# Altium PCB PCB1.PcbDoc
Units mm, origin at the board's own origin, x right, y up, seen from the top; angles counter-clockwise.
Board outline 75.44 x 46.61 mm, 4 copper layers (Top Layer, Mid Layer 1, 3V3, Bottom Layer), stack 1.57 mm thick; 36 components, 27 nets, 138 pads, 32 vias.
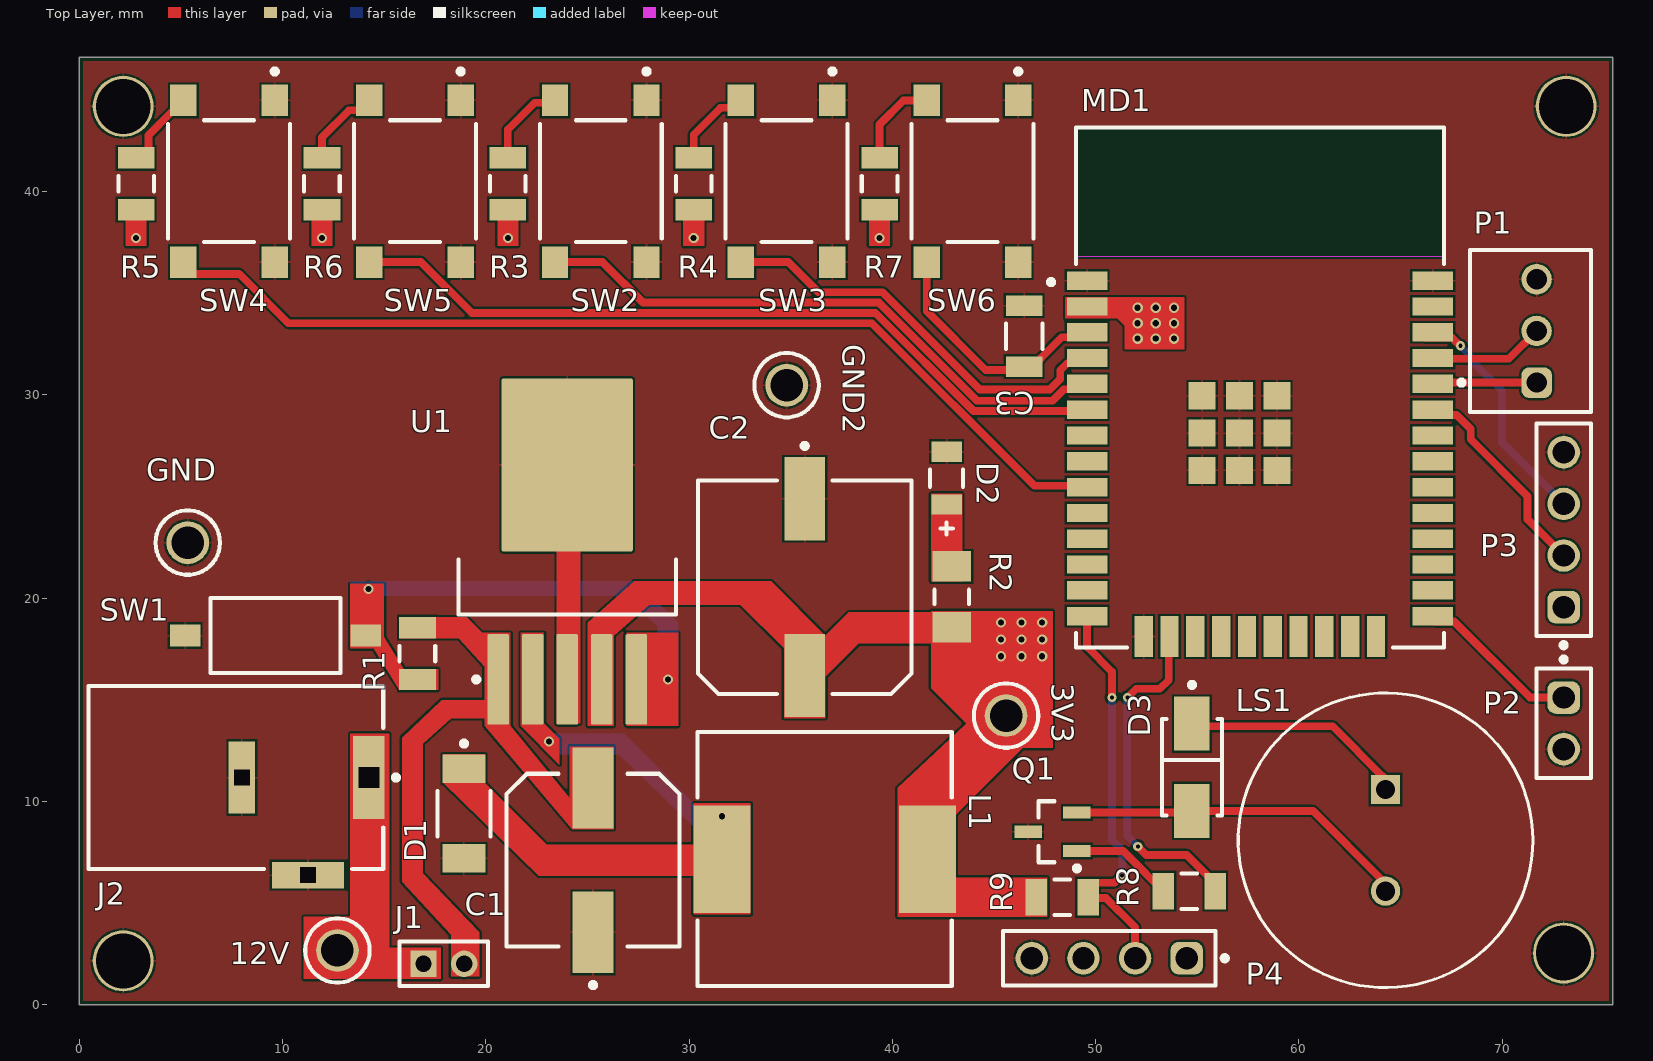
[diagram p0: Top Layer view]
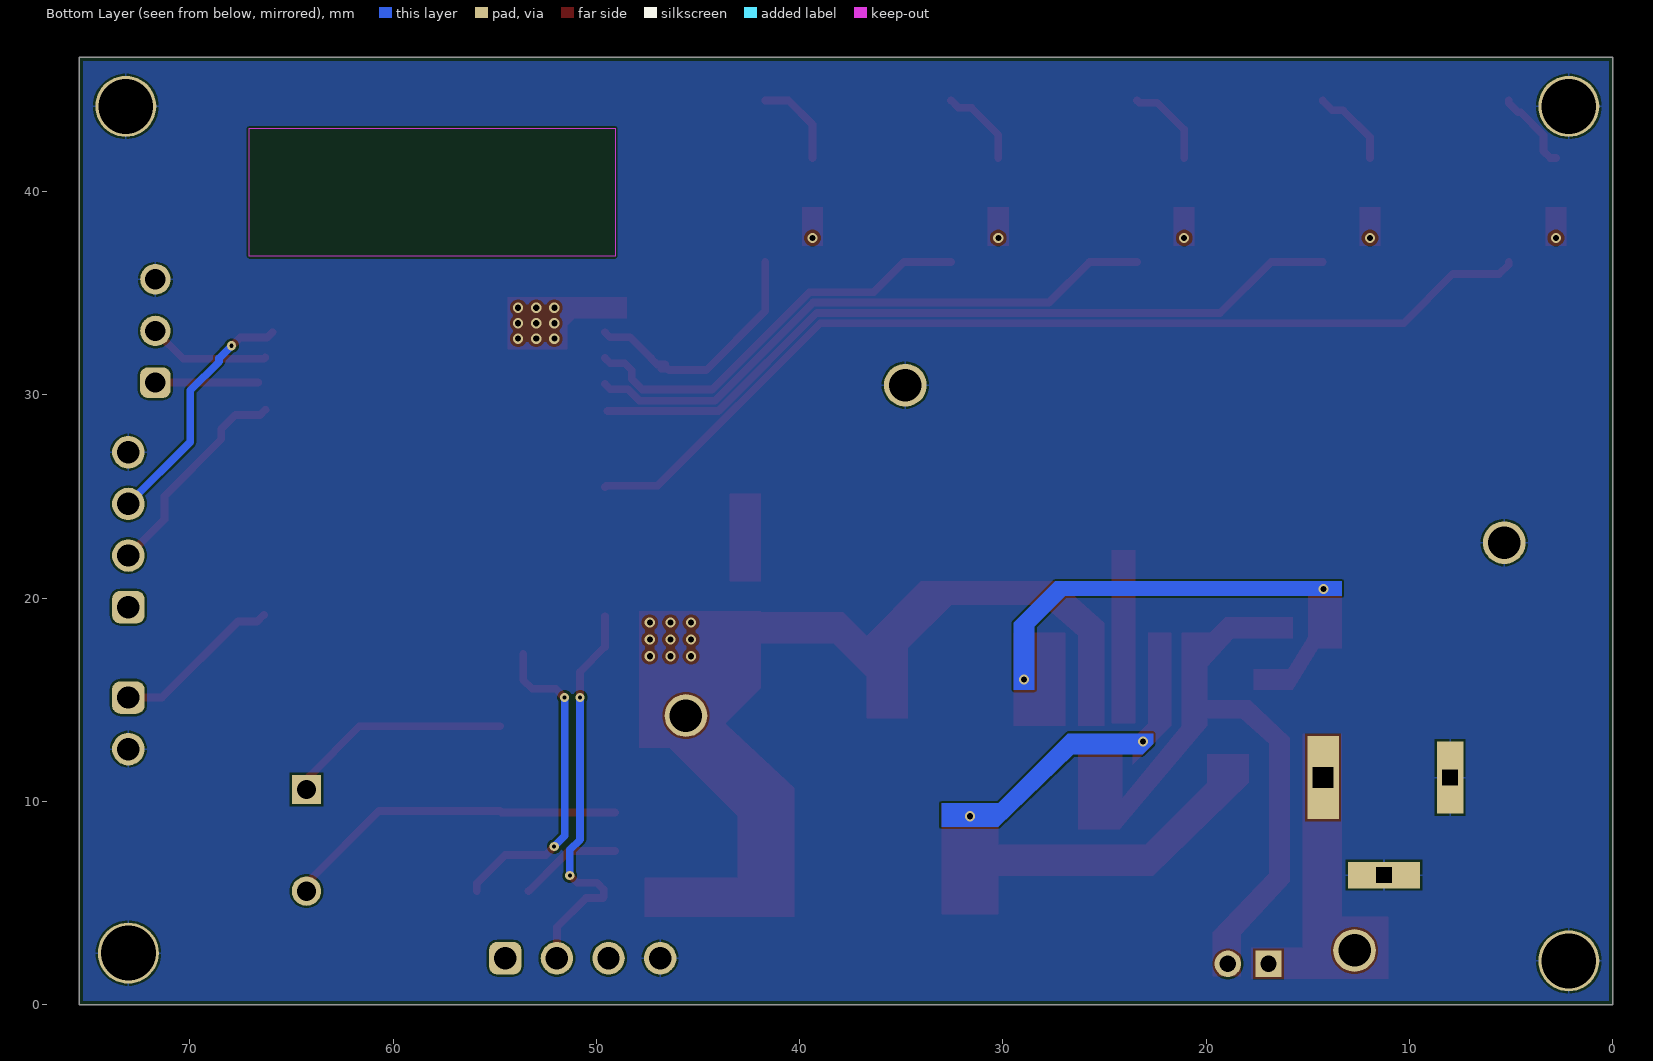
[diagram p1: Bottom Layer view, seen from below]
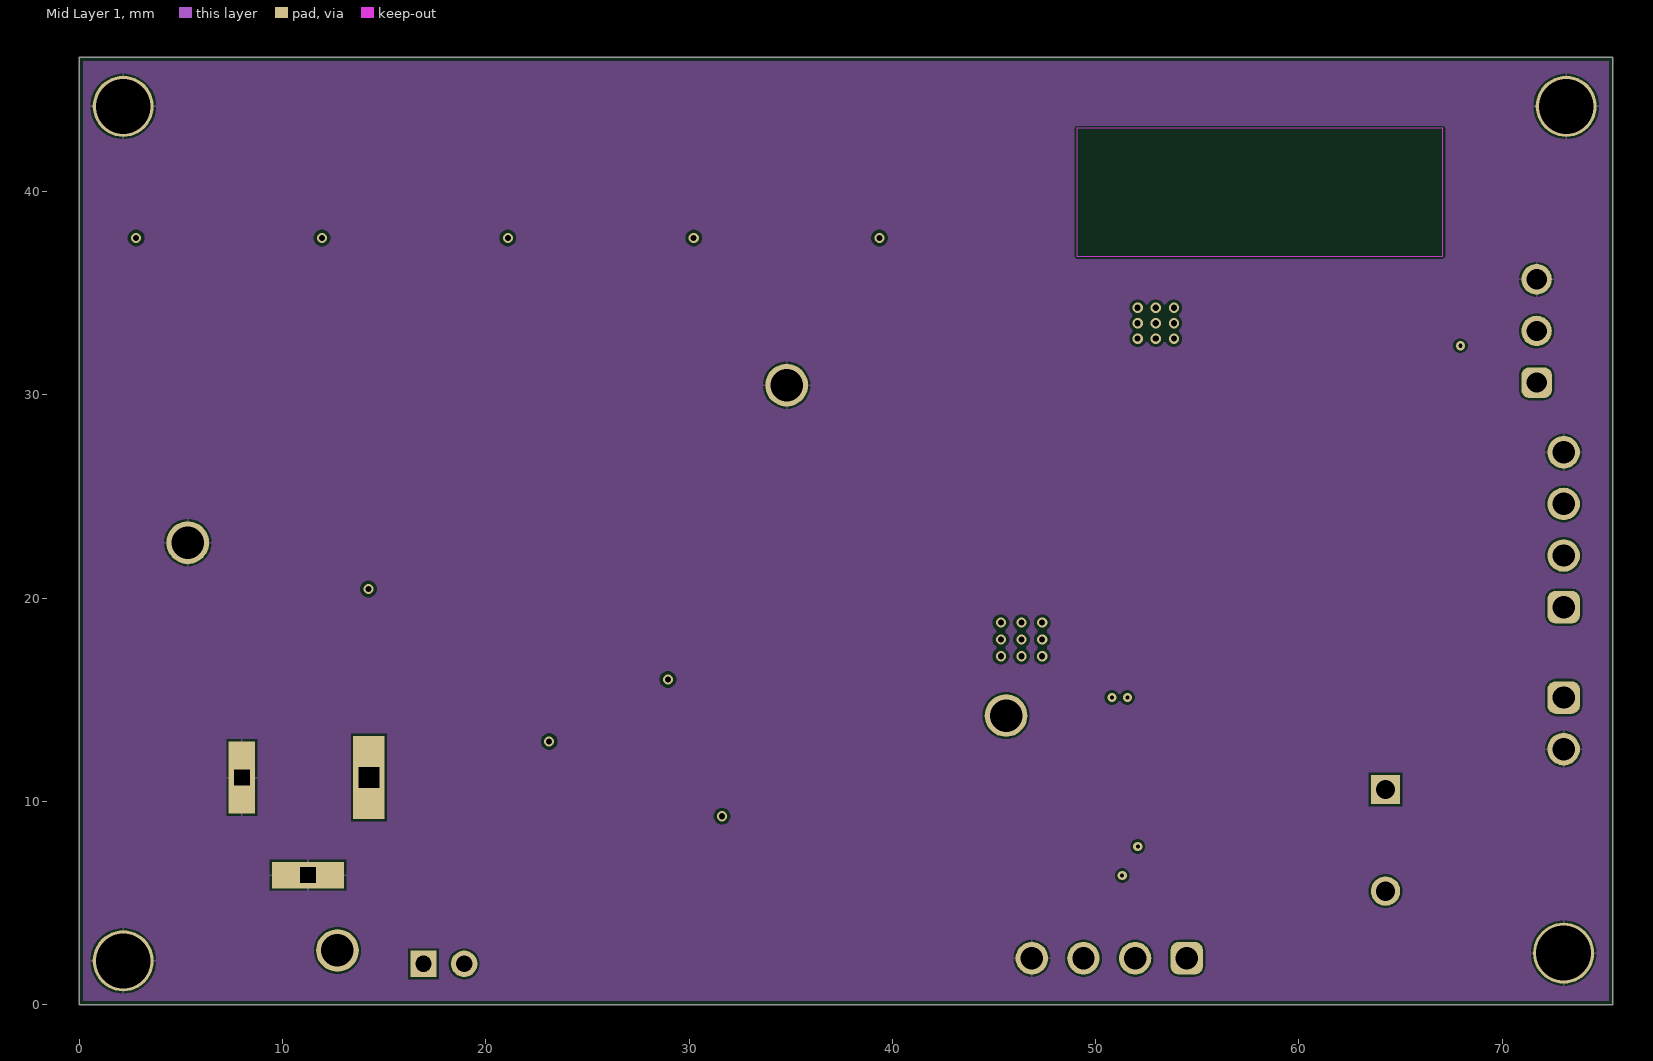
[diagram p2: Mid Layer 1]
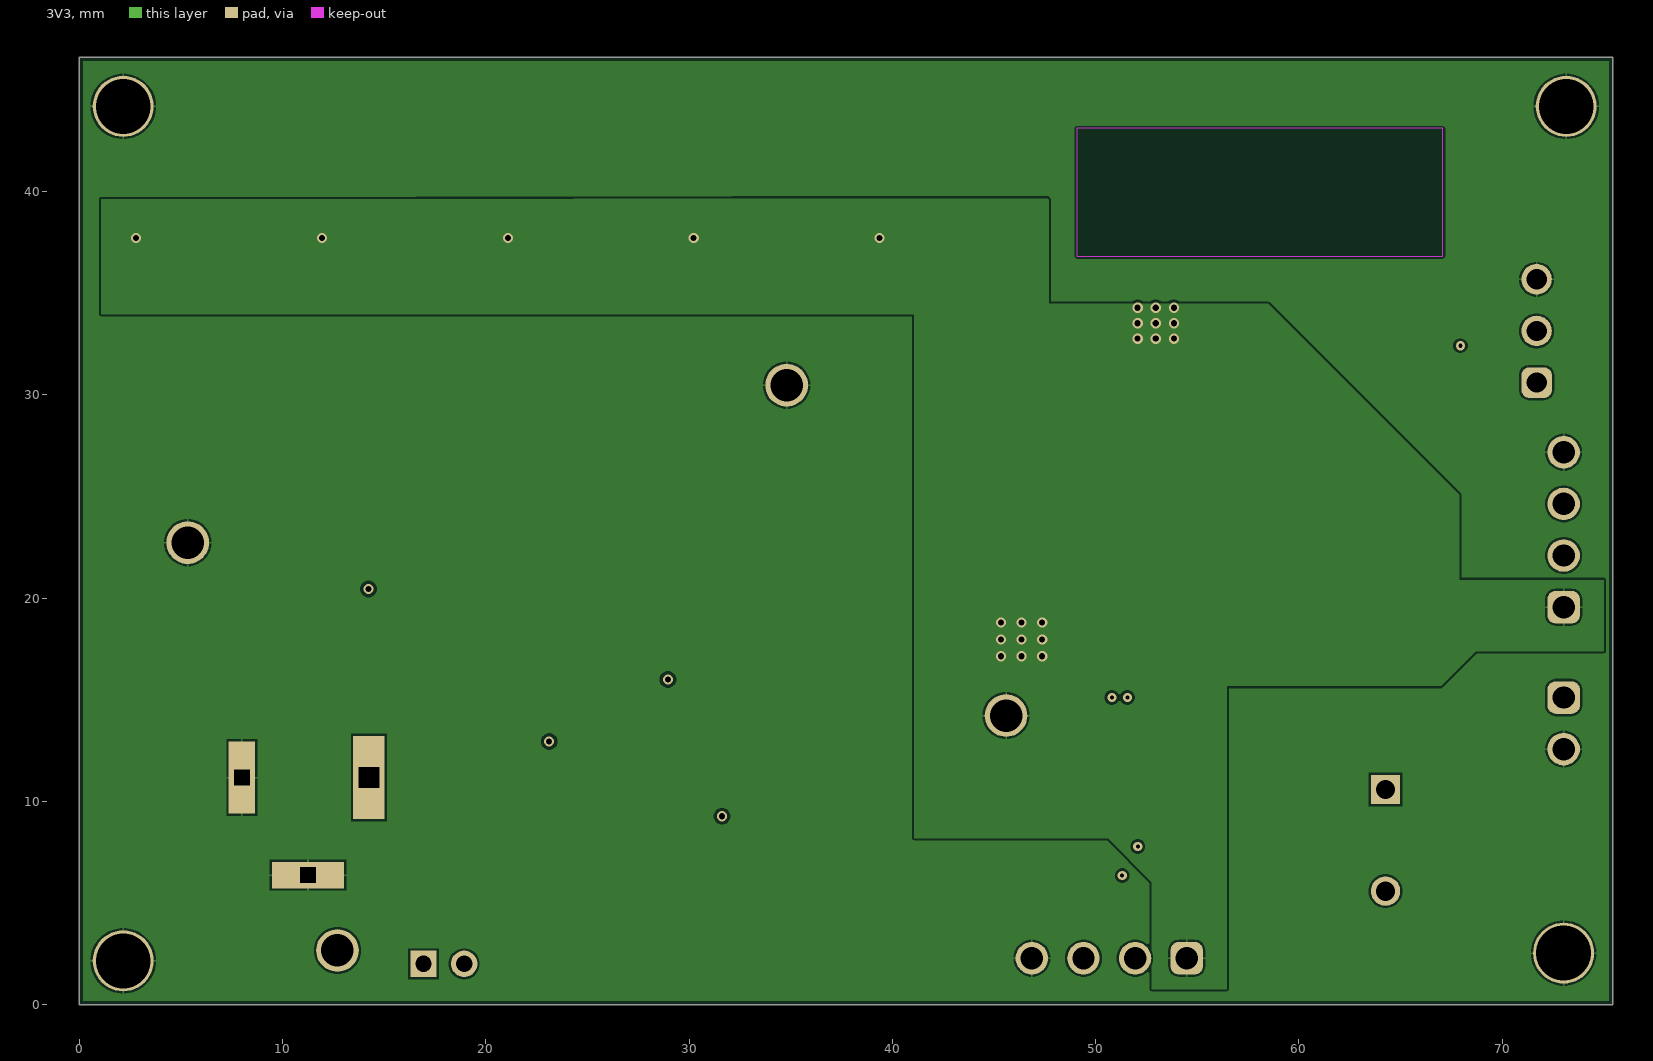
[diagram p3: 3V3]
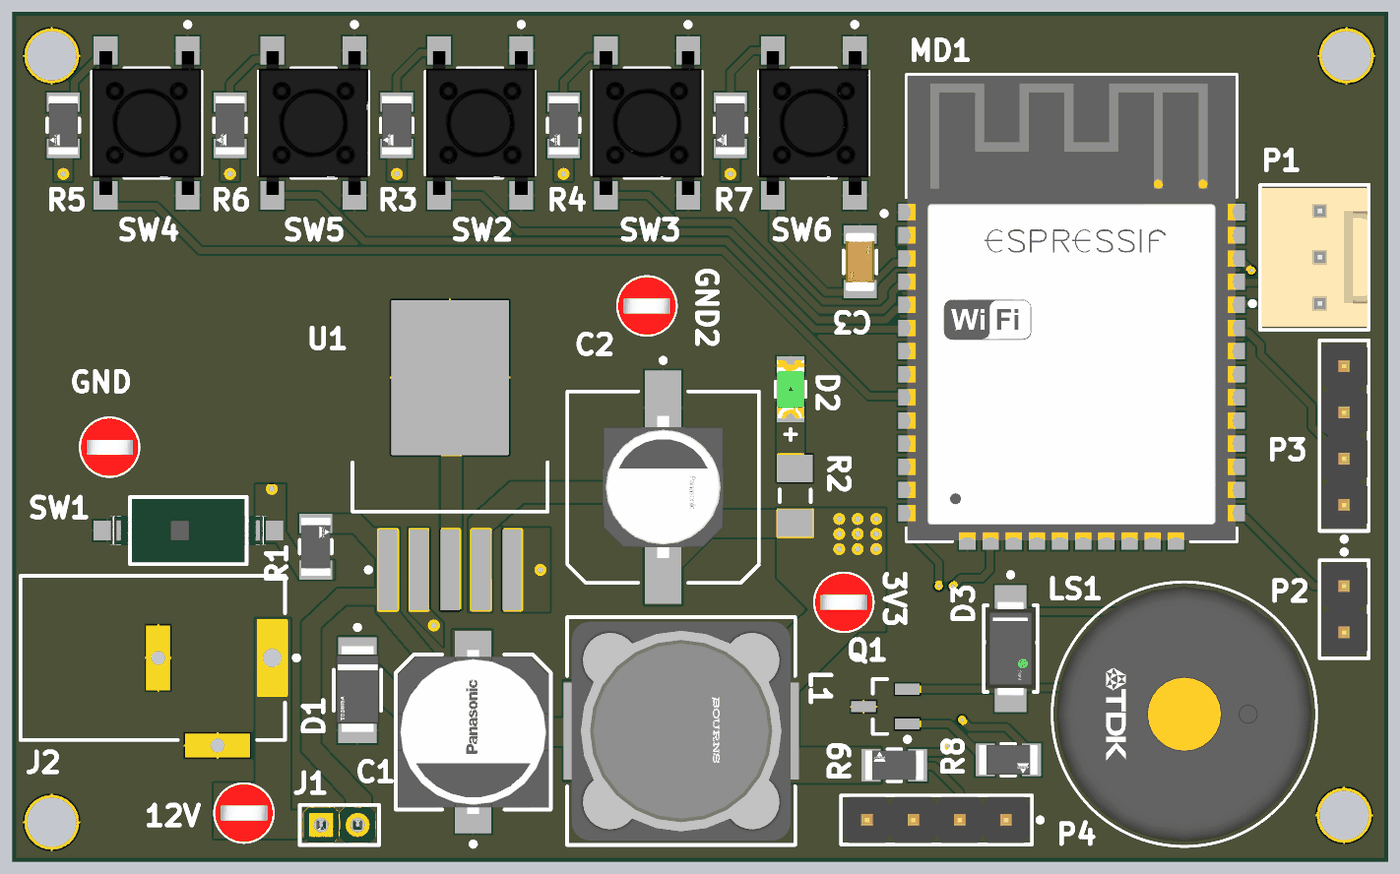
[diagram p4: 3D render of the assembled board from above, using the file's embedded part models]

## Layer stack, top to bottom
Top Solder: solder mask 0.0127, Solder Resist, Dk 3.8
Top Layer: signal copper 0.035
Dielectric 1: prepreg 0.2, 7628, Dk 4.6
Mid Layer 1: signal copper 0.0175
Core: core 1.065, FR-4, Dk 4.5
3V3: signal copper 0.0175
Dielectric 2: prepreg 0.2, 7628, Dk 4.6
Bottom Layer: signal copper 0.035
Bottom Solder: solder mask 0.0127, Solder Resist, Dk 3.8

## Board outline
0,0 75.438,0 75.438,46.609 0,46.609

## Design rules (kind name [scope] priority, off if disabled: settings)
BoardOutlineClearance [All] p1: gap=0.2 ignorepadtopadclearanceinfootprint=FALSE
Clearance [All] p1: gap=0.102 ignorepadtopadclearanceinfootprint=FALSE except(0.127: Arc-Via Track-Via SMDPad-Via THPad-Via Via-Via Via-Fill Via-Poly Via-Region Via-Text; 0.25: Arc-Hole Track-Hole SMDPad-Hole THPad-Hole Via-Hole Fill-Hole Poly-Hole Region-Hole Text-Hole)
ComponentClearance [All] p1: gap=0.102 collisioncheckmode=3 verticalgap=0.102 showdistances=TRUE
DiffPairsRouting [All] p1: maxlimit=0.102 minlimit=0.102 mostfreqgap=0.102 toplayer_minwidth=0.102 toplayer_maxwidth=1816.048 toplayer_prefwidth=0.102 midlayer1_minwidth=0.102 midlayer1_maxwidth=1816.048 midlayer1_prefwidth=0.102 midlayer2_minwidth=0.102 midlayer2_maxwidth=1816.048 midlayer2_prefwidth=0.102 bottomlayer_minwidth=0.102 bottomlayer_maxwidth=1816.048 bottomlayer_prefwidth=0.102 maxuncoupledlength=12.7
Height [All] p1: minheight=0 maxheight=1816.048 prefheight=12.7
HoleSize [All] p1: absolutevalues=TRUE maxlimit=6.3 minlimit=0.2 maxpercent=80.000 minpercent=20.000
HoleToHoleClearance [All] p1: gap=0.25 allowstackedmicrovias=FALSE
MinimumAnnularRing [All] p1: minimumring=0.076
MinimumSolderMaskSliver [All] p1: minsoldermaskwidth=0
PlaneClearance [All] p1: clearance=0.102
PlaneConnect PlaneConnectPowerPads [InPadClass('PowerPads')] p1: planeconnectstyle=Direct reliefexpansion=0.508 reliefentries=4 reliefconductorwidth=0.254 reliefairgap=0.254
PlaneConnect [All] p2: pad.planeconnectstyle=Relief pad.reliefexpansion=0.3 pad.reliefentries=4 pad.reliefconductorwidth=0.102 pad.reliefairgap=0.102 via.planeconnectstyle=Direct via.reliefexpansion=0.3 via.reliefentries=4 via.reliefconductorwidth=0.127 via.reliefairgap=0.127
PolygonConnect PolygonConnectPowerPads [All vs (InPadClass('PowerPads'))] p1: connectstyle=Direct reliefconductorwidth=0.254 reliefentries=4 polygonreliefangle="90 Angle" airgapwidth=0.254
PolygonConnect [All] p2: thpad.connectstyle=Relief thpad.reliefconductorwidth=0.102 thpad.reliefentries=4 thpad.polygonreliefangle="90 Angle" thpad.airgapwidth=0.102 smdpad.connectstyle=Relief smdpad.reliefconductorwidth=0.102 smdpad.reliefentries=4 smdpad.polygonreliefangle="90 Angle" smdpad.airgapwidth=0.102 via.connectstyle=Direct via.reliefconductorwidth=0.127 via.reliefentries=4 via.polygonreliefangle="90 Angle" via.airgapwidth=0.127
RoutingVias [All] p1: holewidth=0.2 width=0.45 viastyle="Through Hole" minholewidth=0.2 minwidth=0.45 maxholewidth=6.3 maxwidth=6.55
SilkToSilkClearance [All] p1: silktosilkclearance=0
SilkToSolderMaskClearance [IsPad] p1: minsilkscreentomaskgap=0.102 clearancetoexposedcopper=TRUE
SolderMaskExpansion [All] p1: expansion=0.075 istentingtop=FALSE
Width [All] p1: maxlimit=1816.048 minlimit=0.102 preferedwidth=0.102
20 further rules are at their usual default settings.

## Classes and differential pairs
component class U_Sensors_Actuators: D3 LS1 P3 P4 Q1 R8 R9
component class U_PowerSupply: 3V3 12V C1 C2 D1 D2 GND GND2 J1 J2 L1 R1 R2 SW1 U1
component class U_Microcontroller: C3 MD1 P1 P2 R3 R4 R5 R6 R7 SW2 SW3 SW4 SW5 SW6

## Components (designator, comment, footprint, x,y, rotation, side; value= is the part's Value field where it differs from the comment)
3V3 "5010" KSTN-5010_V 45.593,14.224 r0 top
12V "5010" KSTN-5010_V 12.7,2.667 r0 top
C1 "470 uF" FP-FKF-MFG 25.273,7.112 r90 top
C2 "330 uF" FP-FKG-MFG 35.687,20.542 r270 top
C3 "100 nF" FP-CC1206-1_25-MFG 46.482,32.893 r90 top
D1 "CMS06" FP-M-FLAT-MFG 18.923,9.398 r90 top
D2 "SML-LX1206GC-TR" FP-SML-LX1206GC-TR-MFG 42.672,25.908 r90 top
D3 "RS1M" FP-403AE-MFG 54.737,11.684 r270 top value=10pF
GND "5010" KSTN-5010_V 5.334,22.733 r0 top
GND2 "5010" KSTN-5010_V 34.798,30.48 r0 top
J1 "M22-2510205" FP-M22-2510205-MFG 17.934,2.012 r0 top
J2 "RAPC722X" SWITCH-RAPC712X-3_V 11.126,11.176 r270 top
L1 "SRR1210-101M" FP-SRR1210-MFG 36.673,7.162 r0 top
LS1 "PS1440P02BT" FP-PS1440P02BT-MFG 64.262,8.088 r270 top
MD1 "ESP32-WROOM-32D" FP-ESP32-WROOM-32D-MFG 58.08,30.364 r0 top
P1 "Programming_Serial" 61900311121 71.395,33.147 r270 top
P2 "IO0_Jumper" 61300211121 73.025,13.843 r270 top
P3 "OLED" 61300411121 73.025,23.368 r90 top
P4 "DHT11" 61300411121 50.673,2.286 r180 top
Q1 "BC847B" INF-SOT23_M 47.879,8.509 r180 top
R1 "1k" FP-CRCW1206-e3-MFG 16.637,17.272 r90 top
R2 "1k" RESC3216X70X50ML20T25 42.926,20.066 r270 top
R3 "1k" FP-CRCW1206-e3-MFG 21.082,40.386 r270 top
R4 "1k" FP-CRCW1206-e3-MFG 30.226,40.386 r270 top
R5 "1k" FP-CRCW1206-e3-MFG 2.794,40.386 r270 top
R6 "1k" FP-CRCW1206-e3-MFG 11.938,40.386 r270 top
R7 "1k" FP-CRCW1206-e3-MFG 39.37,40.386 r270 top
R8 "1k" FP-CRCW1206-e3-MFG 54.61,5.588 r0 top
R9 "1k" FP-CRCW1206-e3-MFG 48.361,5.287 r180 top
SW1 "A6S-1104-H" FP-A6S-1104-H-MFG 9.652,18.161 r90 top
SW2 "PTS645SM43SMTR92LFS" FP-PTS645SM43SMTR92LFS-MFG 25.654,40.513 r270 top
SW3 "PTS645SM43SMTR92LFS" FP-PTS645SM43SMTR92LFS-MFG 34.798,40.513 r270 top
SW4 "PTS645SM43SMTR92LFS" FP-PTS645SM43SMTR92LFS-MFG 7.366,40.513 r270 top
SW5 "PTS645SM43SMTR92LFS" FP-PTS645SM43SMTR92LFS-MFG 16.51,40.513 r270 top
SW6 "PTS645SM43SMTR92LFS" FP-PTS645SM43SMTR92LFS-MFG 43.942,40.513 r270 top
U1 "LM2596S-3.3/NOPB" KTT0005B_M 24.003,22.302 r90 top

## Footprints (in the part's own frame and the unit in brackets; to place one, negate y for a bottom-side part, rotate by r counter-clockwise, add the part's x,y. Pads: shape width x height; smd on the part's side, far side on the other; paste and mask are expansions set on the pad)
61300211121 [mm] "Pin Header, pitch 2.54 mm, THT, Vertical, single row, 2p"
  rrect50% 1.6x1.6 hole 1.1: 1(-1.27,0)
  round 1.6 hole 1.1: 2(1.27,0)
  silkscreen extent -3.26,-1.35 2.69,1.35, body extent -2.54,-1.27 2.54,1.27, height 8.57
61300411121 [mm] "Pin Header, pitch 2.54 mm, THT, Vertical, single row, 4p"
  rrect50% 1.6x1.6 hole 1.1: 1(-3.81,0)
  round 1.6 hole 1.1: 2(-1.27,0) 3(1.27,0) 4(3.81,0)
  silkscreen extent -5.8,-1.35 5.23,1.35, body extent -5.08,-1.27 5.08,1.27, height 8.57
61900311121 [mm] "2.54mm Male Locking Header, 3p"
  rrect50% 1.5x1.5 hole 1: 1(2.54,0.3)
  round 1.5 hole 1: 2(0,0.3) 3(-2.54,0.3)
  silkscreen extent -3.98,-3.52 3.98,2.98, body extent -3.81,-2.9 3.81,2.9, height 11.53
FP-403AE-MFG [mm]
  rect 2.65x1.75 smd paste+0 mask+0: 1(-2.15,0) 2(2.15,0)
  silkscreen extent -4.17,-1.48 2.37,1.48, body extent -3.57,-1.58 3.57,1.58, height 0.25
FP-A6S-1104-H-MFG [mm]
  rect 1.1x1.5 smd paste+0 mask+0: 1(0,-4.45) 2(0,4.45)
  silkscreen extent -1.84,-3.2 1.84,3.2, body extent -1.94,-5.3 1.94,5.3, height 0.25
FP-CC1206-1_25-MFG [mm]
  rect 1x1.8 smd paste+0 mask+0: 1(-1.5,0) 2(1.5,0)
  silkscreen extent -0.63,-0.9 0.63,0.9, body extent -2.2,-1.25 2.2,1.25, height 0.25
FP-CRCW1206-e3-MFG [mm]
  rect 1.05x1.8 smd paste+0 mask+0: 1(-1.275,0) 2(1.275,0)
  silkscreen extent -0.38,-0.87 0.38,0.87, body extent -1.9,-1 1.9,1, height 0.25
FP-ESP32-WROOM-32D-MFG [mm]
  rect 2x0.9 smd paste+0 mask+0: 1(-8.5,5.26) 2(-8.5,3.99) 3(-8.5,2.72) 4(-8.5,1.45) 5(-8.5,0.18) 6(-8.5,-1.09) 7(-8.5,-2.36) 8(-8.5,-3.63) 9(-8.5,-4.9) 10(-8.5,-6.17) 11(-8.5,-7.44) 12(-8.5,-8.71) 13(-8.5,-9.98) 14(-8.5,-11.25) 25(8.5,-11.25) 26(8.5,-9.98) 27(8.5,-8.71) 28(8.5,-7.44) 29(8.5,-6.17) 30(8.5,-4.9) 31(8.5,-3.63) 32(8.5,-2.36) 33(8.5,-1.09) 34(8.5,0.18) 35(8.5,1.45) 36(8.5,2.72) 37(8.5,3.99) 38(8.5,5.26)
  rect 0.9x2 smd paste+0 mask+0: 15(-5.715,-12.25) 16(-4.445,-12.25) 17(-3.175,-12.25) 18(-1.905,-12.25) 19(-0.635,-12.25) 20(0.635,-12.25) 21(1.905,-12.25) 22(3.175,-12.25) 23(4.445,-12.25) 24(5.715,-12.25)
  rect 1.33x1.33 smd paste+0 mask+0: 39(-2.835,-4.075) 39(-2.835,-2.24) 39(-2.835,-0.405) 39(-1,-4.075) 39(-1,-2.24) 39(-1,-0.405) 39(0.835,-4.075) 39(0.835,-2.24) 39(0.835,-0.405)
  Keep-Out Layer region: -9,6.45 9,6.45 9,12.75 -9,12.75
  Keep-Out Layer region: -9,6.45 9,6.45 9,12.75 -9,12.75
  silkscreen extent -10.4,-12.8 9.05,12.8, body extent -9.6,-13.35 9.6,12.9, height 0.25
FP-FKF-MFG [mm]
  rect 4x2 smd paste+0 mask+0: 1(-3.55,0) 2(3.55,0)
  silkscreen extent -6.27,-4.25 4.25,4.25, body extent -5.8,-4.5 5.8,4.5, height 0.25
FP-FKG-MFG [mm]
  rect 4.1x2 smd paste+0 mask+0: 1(-4.35,0) 2(4.35,0)
  silkscreen extent -7.07,-5.25 5.25,5.25, body extent -6.65,-5.5 6.65,5.5, height 0.25
FP-M22-2510205-MFG [mm]
  rect 1.3x1.3 hole 0.8 paste-1000 mask+0: 1(-1,0)
  round 1.3 hole 0.8 paste-1000 mask+0: 2(1,0)
  silkscreen extent -2.17,-1.1 2.17,1.1, body extent -2.27,-1.2 2.27,1.2, height 0.25
FP-M-FLAT-MFG [mm]
  rect 1.4x2.1 smd paste+0 mask+0: 1(-2.2,0) 2(2.2,0)
  silkscreen extent -1.12,-1.3 3.57,1.3, body extent -3,-1.4 3,1.4, height 0.25
FP-PS1440P02BT-MFG [mm]
  rect 1.45x1.45 hole 0.95 paste-1000 mask+0: 1(-2.5,0)
  round 1.45 hole 0.95 paste-1000 mask+0: 2(2.5,0)
  silkscreen extent -7.25,-7.25 7.25,7.25, body extent -7.35,-7.35 7.35,7.35, height 0.25
FP-PTS645SM43SMTR92LFS-MFG [mm]
  rect 1.55x1.3 smd paste+0 mask+0: 1(-3.975,2.25) 2(3.975,2.25) 3(-3.975,-2.25) 4(3.975,-2.25)
  silkscreen extent -5.52,-3 3,3, body extent -4.85,-3.1 4.85,3.1, height 0.25
FP-SML-LX1206GC-TR-MFG [mm]
  rect 1x1.5 smd paste+0 mask+0: 1(-1.3,0) 2(1.3,0)
  silkscreen extent -2.78,-0.81 0.43,0.81, body extent -1.9,-0.91 1.9,0.91, height 0.25
FP-SRR1210-MFG [mm]
  rect 2.8x5.3 smd paste+0 mask+0: 1(-5.05,0) 2(5.05,0)
  silkscreen extent -6.25,-6.25 6.25,6.25, body extent -6.55,-6.35 6.55,6.35, height 0.25
INF-SOT23_M [mm] "SOT23, 3-Leads, Body 2.9x1.3 mm, Pitch 0.95 mm, IPC Low Density"
  rect 1.35x0.6 smd: 1(-1.2,0.95) 2(-1.2,-0.95) 3(1.2,0)
  silkscreen extent -1.33,-1.5 0.7,1.92, body extent -0.7,-1.5 0.7,1.5, height 1.1
KSTN-5010_V [mm] "Test Point, Dia 3.17mm"
  round 2.1 hole 1.6: 1(0,0)
  silkscreen extent -1.59,-1.58 1.59,1.58, body extent -1.59,-1.59 1.59,1.59, height 8.13
KTT0005B_M [mm] "DPAK, 5-Leads, Body 10.65x9.65mm, Pitch 1.7mm, IPC Low Density"
  rrect10% 4.45x1.05 smd: 1(-6.3,3.4) 2(-6.3,1.7) 3(-6.3,0) 4(-6.3,-1.7) 5(-6.3,-3.4)
  rrect2% 8.5x6.45 smd: 6(4.25,0)
  silkscreen extent -6.42,-5.35 -0.4,5.35, body extent -3.1,-5.32 6.55,5.33, height 4.83
RESC3216X70X50ML20T25 [mm] "Chip Resistor, 2-Leads, Body 3.20x1.60mm, IPC Low Density"
  rect 1.5x1.9 smd: 1(-1.5,0) 2(1.5,0)
  silkscreen extent -0.35,-0.85 0.35,0.85, body extent -1.7,-0.9 1.7,0.9, height 0.7
SWITCH-RAPC712X-3_V [mm] "CONN, 3-Leads, Body 14.5x9mm"
  rect 4.1x1.55 hole 1.01 square: 1(0,3.125)
  rect 3.55x1.3 hole 0.76 square: 2(0,-3.125)
  rect 1.3x3.55 hole 0.76 square: 3(4.8,0.125)
  silkscreen extent -4.5,-10.68 4.5,4.58, body extent -4.5,-10.68 4.5,3.83, height 11

## Part data
3V3 12V GND GND2: library part CMP-1672-00002-4, "Test Point, Red, Through Hole, RoHS, Bulk", Colour=Red, Manufacturer=Keystone, Package Quantity=100, ComponentLink1Description="Manufacturer URL", ComponentLink1URL=http://www.keyelco.com/, ComponentLink2Description=Datasheet, ComponentLink2URL=http://www.keyelco.com/product-pdf.cfm?p=1319, Contact Material=Bronze, Contact Plating=Silver, DatasheetVersion="Rev. F, 12/2013", Height="8.12 mm", Mount="Through Hole", Mounting Technology="Through Hole", PackageDescription="1-Pin Through Hole Device, Dia 3.17 mm", PackageReference=5010, Packaging=Bulk, Pins=1, REACH SVHC="No SVHC", RoHSCompliant=true
C1: library part CMP-2000-06208-3, "CAP ALUM 100UF 20% 50V SMD", Capacitance=100uF, Case/Package=Radial, Dielectric Material=Aluminium, ESR (Equivalent Series Resistance)=340mR, Leakage Current=3uA, Max Operating Temperature=105°C, Min Operating Temperature=-55°C, Package Quantity=1, Ripple Current=350mA, Tolerance=20%, Voltage=50V, Construction=Cylindrical, Contact Plating=Tin, Diameter=8mm, Height=10.2mm, Height - Seated (Max)=0.402inch, Impedance=340mR, Lead Free="Lead Free", Length=10.2mm, Life (Hours)=2000Hour, Material=Aluminium, Mount="Surface Mount", Number of Pins=2, Packaging="Tape and Reel", Radiation Hardening=No, REACH SVHC="No SVHC", Ripple Current (AC)=350mA, RoHS Compliant=Yes, Series=FK, Termination=SMD/SMT, Voltage Rating=50V, Voltage Rating (DC)=50V, Width=10mm
C2: library part CMP-05427-002115-1, "CAP ALUM 330UF 20% 35V SMD", Capacitance=330uF, Case/Package=Radial, Dielectric Material=Aluminium, ESR (Equivalent Series Resistance)=80mR, Leakage Current=115.5uA, Max Operating Temperature=105°C, Min Operating Temperature=-55°C, Package Quantity=500, Ratings=AEC-Q200, Ripple Current=850mA, Tolerance=20%, Voltage=35V, Construction=Cylindrical, Contact Plating=Tin, Diameter=10mm, Height=10.2mm, Height - Seated (Max)=0.402inch, Impedance=80mR, Lead Free="Lead Free", Lead Length=3.5mm, Lead Pitch=4.6mm, Length=10.2mm, Life (Hours)=2000Hour, Mount="Surface Mount", Number of Pins=2, Packaging="Tape and Reel", Radiation Hardening=No, Reach SVHC Compliant=Yes, Ripple Current (AC)=850mA, RoHS Compliant=Yes, Series=FK, Termination=SMD/SMT, Voltage Rating=35V, Voltage Rating (DC)=35V, Width=10.3mm
C3: library part CMP-03422-000842-1, "CAP CER 0.1UF 50V X7R 1206", Manufacturer=Yageo, Manufacturer Part Number=CC1206KRX7R9BB104, Package=CC1206-1.25, Temperature="-55°C to +125°C", Temperature Characteristic=X7R, Temperature Coefficient=15%, Temperature Range High=+125°C, Temperature Range Low=-55°C, Tolerance=0.1, Voltage Rating="50 V", Automotive=No, Automotive Grade=NA, Capacitance="100 nF", Category=Cap, ComponentLink2Description=Datasheet, ComponentLink2URL=http://www.yageo.com/documents/recent/UPY-NP0X7R_HV_1KV-to-3KV_11.pdf, Device Class L1="Passive Components", Device Class L2=Capacitors, Device Class L3="Ceramic Capacitors", Digikey Description="CAP CER 0.1UF 50V X7R 1206", Footprint Url=http://www.yageo.com/exep/pages/download/literatures/UPY-C_GEN_24.pdf, Height=1.45mm, Lead Free=Yes, Material=Ceramic, Mouser Description="Multilayer Ceramic Capacitors MLCC - SMD/SMT 100nF 50V X7R 10%", Octopart=https://octopart.com/cc1206krx7r9bb104-yageo-39467816, RoHS=TRUE
D1: library part CMP-2000-06115-2, "DIODE SCHOTTKY 30V 2A MFLAT", Average Rectified Current=2A, Forward Voltage=370mV, Max Operating Temperature=125°C, Max Repetitive Reverse Voltage (Vrrm)=30V, Max Reverse Leakage Current=3mA, Max Surge Current=40A, Min Operating Temperature=-40°C, Package Quantity=1, Contact Plating=Tin, Element Configuration=Single, Forward Current=2A, Max Reverse Voltage (DC)=30V, Mount="Surface Mount", Number of Pins=2, Packaging="Tape and Reel", Peak Non-Repetitive Surge Current=40A, Peak Reverse Current=3mA, Radiation Hardening=No
D2: library part CMP-2000-07122-2, "LED GREEN CLEAR 1206 SMD", Case Code (Imperial)=1206, Case Code (Metric)=3216, Color=Green, Current Rating=25mA, Forward Current=20mA, Forward Voltage=2.2V, Lens Color=Colorless, Max Operating Temperature=85°C, Min Operating Temperature=-40°C, Package Quantity=1, Power Rating=65mW, Approvals=UL, Case/Package=1206, Dominant Wavelength=565nm, Height=1.1mm, Illumination Color=Green, Lead Free="Lead Free", Length=3.2mm, Lens Style=Rectangular, Lens Transparency=Clear, Luminous Intensity=10mcd, Mount="Surface Mount", Number of LEDs=1, Number of Pins=2, Packaging="Tape and Reel", REACH SVHC="No SVHC", RoHS Compliant=Yes, Test Current=20mA, Viewing Angle=160°, Wavelength=565nm, Width=1.6mm
D3: library part CMP-07163-000022-1, "DIODE GEN PURP 1KV 1A SMA", Capacitance=10pF, Forward Current=1A, Manufacturer="ON Semiconductor", Max Junction Temp=+150°C, Max Repetitive Reverse Voltage=1000V, Max Surge Forward Current=30A, Package=403AE, Peak Reverse Current=5uA, Temperature="-55°C to +150°C", Temperature Range Low=-55°C, Automotive=No, Category=Diode, ComponentLink2Description=Datasheet, ComponentLink2URL=https://www.onsemi.com/pub/Collateral/RS1M-D.PDF, Device Class L1="Discrete Semiconductors", Device Class L2=Diodes, Device Class L3="Rectifier Diodes", Digikey Description="DIODE GEN PURP 1KV 1A SMA", Footprint Url=https://www.onsemi.com/pub/Collateral/403AE.PDF, Height=2.5mm, Lead Free=Yes, Manufacturer Part Number=RS1M, Mouser Description="On a Reel of 7500, ON Semi 1000V 1A, Diode, 2-Pin DO-214AC RS1M", Octopart=https://octopart.com/rs1m-on+semiconductor-84331238, RoHS=TRUE, Standoff Height=0.05mm, Temperature Range High=+150°C
J1: library part CMP-15831-000005-1, "CONN HEADER VERT 2POS 2MM", Current Rating=2A, Manufacturer=Harwin, Package=0, Temperature="-40°C to +105°C", Temperature Range High=+105°C, Temperature Range Low=-40°C, Automotive=No, Category=Conn, ComponentLink2Description=Datasheet, ComponentLink2URL=https://cdn.harwin.com/pdfs/C018XX_M22_Series_Connectors.pdf, Conn Gender=Male, Conn Orientation=Vertical, Contact Material=Gold,Nickel, Device Class L1=Connectors, Device Class L2="Headers and Wire Housings", Device Class L3=unset, Digikey Description="CONN HEADER VERT 2POS 2MM", Footprint Url=https://cdn.harwin.com/pdfs/M22-251.pdf, Height=5.45mm, Lead Free=Yes, Manufacturer Part Number=M22-2510205, Mouser Description="Headers & Wire Housings 2 PIN SIL VERTICAL GOLD PIN HEADER", Number Of Contacts=2, Number Of Rows=1, Octopart=https://octopart.com/m22-2510205-harwin-2538221, Pitch=2mm, RoHS=TRUE
J2: library part CMP-2000-05384-1, "Power Jack, 5 A, 3-Pin THD, RoHS, Bulk", Color=Black, Current Rating=5A, Manufacturer=Switchcraft, Standard Package=2,500, Catalog Drawings="RAPC7(1,2)2XSide /  / RAPC7(1,2)2XTop", Category=Connectors,Interconnects, Connector Type=Jack, Contact Material=Brass, Contact Material - Plating=Nickel, Datasheet URL=http://www.mouser.com/ds/2/393/rapc722x_cd-371352.pdf, Datasheet Version="Rev. A, 08/2005", Dynamic Catalog=SwitchcraftInc, Family=Barrel-PowerConnectors, Gender=Male, Housing Color=Black, Housing Material=Thermoplastic, Internal Switch(s)=SingleSwitch,NormallyClosed, Manufacturer URL=http://www.switchcraft.com/, Mating Products="S765-ND / -CONNPLUGMINIPWR2CONDWHT/RED / S760K-ND / -CONNPOWERPLUGMINI.08\"BLACK / SC1052-ND / -CONNPOWERPLUGMINIBLACK", Mounting Type=ThroughHole,RightAngle, Number of Positions/Contacts=2Conductors,2Contacts, Other Names="Q2287470A / RAPC722X-ND / SC1313", Plug/Mating Plug Diameter=2.1mmID,5.5mmOD, RoHS Information=SwitchcraftRoHSInfo, Shielding=Unshielded, Termination=SolderEyelet(s)
L1: library part CMP-07248-000065-1, "FIXED IND 100UH 2.5A 135MOHM SMD", Case/Package=1210, Current Rating=2.5A, DC Resistance (DCR)=135mR, Inductance=100uH, Inductance Tolerance=20%, Max Operating Temperature=125°C, Min Operating Temperature=-40°C, Package Quantity=1, Resistor Type=Wirewound, Saturation Current=2.2A, Self Resonant Frequency=3MHz, Test Frequency=100kHz, Core Material=Ferrite, DC Current=2.5A, Depth=12.5mm, Height=10mm, Height - Seated (Max)=0.394inch, Length=12mm, Max DC Current=2.5A, Military Standard=Not, Mount="Surface Mount", Packaging="Tape and Reel", Q Factor=16, REACH SVHC="No SVHC", RMS Current (Irms)=2.5A, RoHS Compliant=Yes, Series=SRR1210, Shielding=Shielded, Termination=SMD/SMT, Tolerance=20%, Width=0.472inch
LS1: library part CMP-08413-000003-1, "AUDIO PIEZO TRANSDUCER 30V TH", Frequency=4kHz, Max Operating Temperature=70°C, Min Operating Temperature=-10°C, Operating Supply Voltage=3V, Package Quantity=350, Diameter=14mm, Height=8mm, Lead Free="Lead Free", Mount="Through Hole", Number of Terminals/Pins=2, Packaging="Tape and Reel", RoHS Compliant=Yes, Self Resonant Frequency=4kHz, Termination="PC Pins", Voltage Rating (DC)=3V, Washable=No
MD1: library part CMP-194065-000003-1, "WIFI MODULE 32MBITS SPI FLASH", Manufacturer="Espressif Systems", Max Frequency=2484MHz, Max Supply Voltage=3.6V, Min Supply Voltage=3V, Nominal Supply Current=500mA, Temperature="-40°C to +85°C", Temperature Range High=+85°C, Temperature Range Low=-40°C, Automotive=No, Bandwidth=72MHz, Category=UNK, ComponentLink2Description=Datasheet, ComponentLink2URL=https://www.espressif.com/sites/default/files/documentation/esp32-wroom-32d_esp32-wroom-32u_datasheet_en.pdf, Data Rate=150Mbits/s, Device Class L1="Integrated Circuits (ICs)", Device Class L2="RF Semiconductors and Devices", Device Class L3=Transceivers, Digikey Description="WIFI MODULE 32MBITS SPI FLASH", Height=3.2mm, Interface=I2C,SPI,UART,Ethernet,I2S,Other, Lead Free=Yes, Manufacturer Part Number=ESP32-WROOM-32D, Mouser Description="Wi-Fi/BT BLE Module ESP32-D0WD, SPI Flash, UART, P", Number Of Adc Channels=16, Number Of Gpio=32, Octopart=https://octopart.com/esp32-wroom-32d-espressif+systems-91040050, Package=ESP32-WROOM-32D, RoHS=TRUE, Sensitivity=-98dBm
P1: library part CMP-1502-00585-2, Color=Beige, Contact Resistance=20mΩ, Current Rating=3A, Flammability Rating="UL94 V-0", Insulation Resistance=1GΩ, Max Operating Temperature=105°C, Min Operating Temperature=-40°C, Operating Supply Voltage=250V, Connector Type="Male Pin", Contact Gender=Male, Contact Material=Copper, Contact Mating Length=7.493mm, Contact Plating=Tin, Fastening Type=Friction, Gender=Male, Height=12.5mm, Housing Material=Nylon, Lead Pitch=2.54mm, Length=7.62mm, Mount="Through Hole", NexarPartId=18818222, Number Of Contacts=3, Number of Pins=3, Number of Positions=3, Number Of Rows=1, Orientation=Vertical, Packaging=Bulk, Pitch=2.54mm, REACH SVHC=Unknown, RoHS=Compliant, Termination="Through Hole", Voltage Rating=250V, Width=7.66mm
P2: library part CMP-1712-00002-6, Color=Black, Contact Resistance=20mΩ, Current Rating=3A, Max Operating Temperature=125°C, Min Operating Temperature=-40°C, Operating Supply Voltage=250V, Connector Type="Male Pin", Contact Gender=Male, Contact Material=Copper, Contact Mating Length=5.9944mm, Contact Plating=Gold, Gender=Male, Height=8.94mm, Housing Material=PBT, Lead Free="Lead Free", Lead Pitch=2.54mm, Mount="Through Hole", NexarPartId=20081794, Number Of Contacts=2, Number of Pins=2, Number of Positions=2, Number Of Rows=1, Orientation=Vertical, Packaging=Bulk, Pitch=2.54mm, REACH SVHC="No SVHC", RoHS=Compliant, Termination="Through Hole", Voltage Rating=250V
P3 P4: library part CMP-1502-01064-3, Color=Black, Contact Resistance=20mΩ, Current Rating=3A, Max Operating Temperature=105°C, Min Operating Temperature=-40°C, Operating Supply Voltage=250V, Connector Type="Male Pin", Contact Material=Copper, Contact Mating Length=5.9944mm, Contact Plating=Gold, Gender=Male, Height=8.89mm, Lead Free="Lead Free", Lead Pitch=2.54mm, Mount="Through Hole", NexarPartId=32855522, Number Of Contacts=4, Number of Pins=4, Number of Positions=4, Number Of Rows=1, Orientation=Vertical, Packaging=Bulk, Pitch=2.54mm, REACH SVHC=Unknown, RoHS=Compliant, Termination=Solder, Voltage Rating=250V
Q1: library part CMP-1177-00042-1, "NPN Silicon AF Transistor, 45 V VCEO, 100 mA IC, SOT23, Reel, Green", Manufacturer=Infineon, ComponentLink1Description="Manufacturer URL", ComponentLink1URL=http://www.infineon.com/, ComponentLink2Description=Datasheet, ComponentLink2URL=http://www.infineon.com/dgdl/bc847series_bc848series_bc849series_bc850series.pdf?folderId=db3a304314dca389011541d30fa21656&fileId=db3a304314dca389011541d4630a1657, ComponentLink3Description="Package Specification", ComponentLink3URL=http://www.infineon.com/dgdl/SOT23-Package_Overview.pdf?folderId=db3a30431936bc4b0119532290053c66&fileId=db3a30431936bc4b0119533468123c85, fT (typ)="250Â MHz", Green=TRUE, IBM (max)="200Â mA", IC (max)="100Â mA", ICBO (max)="15Â nA", ICM (max)="200Â mA", Mounting Technology="Surface Mount", PackageDescription="3-Pin Small Outline Transistor Package, 1.3 x 2.9 mm Body, 0.95 mm Pitch", PackageReference=SOT23, PackageVersion=Apr-08, Packing=Reel, PartNumber=BC847B, Polarity=NPN, Ptot (max)="330Â mW", VCBO (max)="50Â V", VCEO (max)="45Â V", VEBO (max)="6Â V"
R1 R3 R4 R5 R6 R7 R8 R9: library part CMP-2003-01876-2, "RES Thick Film, 1.2kΩ, 1%, 0.25W, 100ppm/°C, 1206", Case Code (Imperial)=1206, Case Code (Metric)=3216, Max Operating Temperature=155°C, Max Power Dissipation=250mW, Min Operating Temperature=-55°C, Package Quantity=10, Resistance=1.2kR, Temperature Coefficient=100ppm/°C, Tolerance=1%, Voltage Rating=200V, Case/Package=1206, Composition="Thick Film", Contact Plating=Tin, Depth=1.6mm, Features="Automotive AEC-Q200", Height=0.55mm, Lead Free="Lead Free", Length=3.2mm, Military Standard=Not, Number of Terminations=2, Packaging="Tape and Reel", Power Rating=250mW, Radiation Hardening=No, Termination=SMD/SMT, Voltage Rating (DC)=200V, Weight=0.000353oz, Width=0.063inch, Working Voltage=200V
R2: library part CMP-2003-04435-1, Manufacturer=Panasonic, Part Number=ERA8AEB202V
SW1: library part CMP-08827-000005-1, "SWITCH SLIDE DIP SPST 25MA 24V", Ambient Temperature Range High=+70°C, Ambient Temperature Range Low=-20°C, Contact Current Rating=25mA, Contact Resistance=200mΩ, Manufacturer="Omron Electronics Inc-EMC Div", Package=0, Temperature="-20°C to +70°C", Voltage Rating Dc=24V, Automotive=No, Category=Switch, ComponentLink2Description=Datasheet, ComponentLink2URL=https://omronfs.omron.com/en_US/ecb/products/pdf/en-a6s.pdf, Device Class L1=Electromechanical, Device Class L2=Switches, Device Class L3="DIP Switches", Digikey Description="SWITCH SLIDE DIP SPST 25MA 24V", Electromechanical Life=1000Cycles, Height=3.95mm, Lead Free=Yes, Manufacturer Part Number=A6S-1104-H, Mount="Surface Mount", Mouser Description="DIP Switches / SIP Switches Dip Switch", Number Of Circuits=1, Octopart=https://octopart.com/a6s-1104-h-omron-55410938, RoHS=TRUE, Standoff Height=0mm, Temperature Range High=+70°C, Temperature Range Low=-20°C, Throw Configuration=SPST-NO
SW2 SW3 SW4 SW5 SW6: library part CMP-2000-05160-2, "SWITCH TACTILE SPST-NO 0.05A 12V", Case/Package=SMD/SMT, Color=Black, Contact Resistance=100mR, Current Rating=50mA, Max Operating Temperature=60°C, Max Voltage Rating (DC)=12V, Min Operating Temperature=-20°C, Operating Force=160gf, Package Quantity=1, Actuator Length=0.85mm, Actuator Material=Nylon, Actuator Type=Standard, Contact Material=Silver, Contact Plating=Silver, Depth=9mm, Illumination Type=Non-Illuminated, Lead Free="Lead Free", Length=6mm, Max Current Rating=50mA, Mechanical Life=100000Cycles, Mount="Surface Mount", Orientation=Straight, Packaging="Tape and Reel", REACH SVHC="No SVHC", Switch Function=Off-Mom, Termination="Gull Wing", Throw Configuration=SPST, Voltage Rating (DC)=12V
U1: library part CMP-0069-00275-3, "SIMPLE SWITCHER® Power Converter 150 KHz 3A Step-Down Voltage Regulator, 5-pin TO-263, Pb-Free", Manufacturer="Texas Instruments", PackageTopMarking="NSUZXYTTE#*LM2596S*-3.3 P+", PowerWise=N, Code_JEDEC=MO-169-AB, ComponentLink1Description="Datasheet URL", ComponentLink1URL=http://www.ti.com/general/docs/lit/getliterature.tsp?genericPartNumber=LM2596&fileType=pdf, CompType=Switcher, PackageDescription="TO-263, Molded, .400 x .390 x .180in, 5 Lead, .067in Pitch, Surface Mount", PackageReference=KTT0005B, PinCount=5, RoHS=Y

## Free pads (board coordinates)
  round 3 hole 2.7: 12(2.159,2.159) 13(73.152,44.196) 14(2.159,44.196) 15(73.025,2.54)

## Via types
v1: diameter 0.5, hole 0.3, Top Layer to Bottom Layer, 27 vias
v2: diameter 0.45, hole 0.2, Top Layer to Bottom Layer, 5 vias

## Nets (pads, with @x,y where several pads share a name; then routed paths per layer and width w, separated by ;. In a path a pad name is that pad's centre, name@x,y a point inside that pad or via, vN(x,y) a via of type N, cw(c..) or ccw(c..) an arc to the next point about the centre after c; other vN are vias at no path point)
3V3: 3V3.1 C2.2 L1.2 MD1.2 P3.1 P4.1 R2.2 R3.2 R4.2 R5.2 R6.2 R7.2 R9.2 U1.4
  other v1: 45.339,17.145 46.355,17.145 47.371,17.145 45.339,17.97 46.355,17.97 47.371,17.97 45.339,18.796 46.355,18.796 47.371,18.796 52.07,32.766 52.959,32.766 53.848,32.766 52.07,33.528 52.959,33.528 53.848,33.528 52.07,34.29 52.959,34.29 53.848,34.29 2.794,37.719 11.938,37.719 21.082,37.719 30.226,37.719 39.37,37.719
+12V: 12V.1 J1.1 J2.1
Button1: MD1.5 SW2.4 | length 29.3
  Top Layer w0.381: SW2.4 25.736,36.538 27.73,34.544 39.338,34.544 44.164,29.718 47.879,29.718 48.445,30.284 49.32,30.284 MD1.5
Button2: MD1.4 SW3.4 | length 20.5
  Top Layer w0.381: SW3.4 34.88,36.538 36.366,35.052 39.512,35.052 44.301,30.264 47.742,30.264 48.26,30.781 48.26,31.216 48.598,31.554 49.32,31.554 MD1.4
Button3: MD1.9 SW4.4 | length 49.1
  Top Layer w0.381: SW4.4 5.116,36.413 5.576,35.953 7.862,35.953 10.287,33.528 38.989,33.528 46.99,25.527 49.517,25.527 MD1.9
Button4: MD1.6 SW5.4 | length 38.2
  Top Layer w0.381: SW5.4 16.802,36.538 19.304,34.036 39.163,34.036 43.989,29.21 MD1.6@49.455,29.21
EN: C3.1 MD1.3 SW6.4 | length 12.4
  Top Layer w0.381: SW6.4 41.692,34.127 44.599,31.22 46.436,31.22 46.513,31.297 C3.1@46.81,31.297 ; C3.1@46.609,31.496 47.009,31.496 47.319,31.806 47.319,31.825 48.331,32.837 49.333,32.837 MD1.3
GND: C1.1 C2.1 C3.2 D1.1 D2.2 GND2.1 GND.1 J2.2 J2.3 MD1.1 MD1.15 MD1.38 MD1.39 P1.3 P2.2 P3.4 P4.4 pad.12 pad.13 pad.14 pad.15 Q1.3 SW1.2 SW2.1 SW2.2 SW3.1 SW3.2 SW4.1 SW4.2 SW5.1 SW5.2 SW6.1 SW6.2 U1.3 U1.6
IO0: MD1.25 P2.1 | length 8.4
  Top Layer w0.381: MD1.25@66.358,19.177 66.68,18.854 67.633,18.854 71.374,15.113 P2.1
NetD1_2: D1.2 L1.1 U1.2
  other v1: 31.623,9.271 23.114,12.954
NetD2_1: D2.1 R2.1 | length 0.4
  Top Layer w0.381: R2.1@42.672,21.82 R2.1
NetD3_1: D3.1 LS1.1 | length 10.4
  Top Layer w0.381: D3.1@54.737,13.698 61.66,13.698 LS1.1@64.135,11.223
NetD3_2: D3.2 LS1.2 Q1.2 | length 16.5
  Top Layer w0.381: Q1.2 54.662,9.459 D3.2 60.697,9.534 LS1.2@64.135,6.096
NetMD1_14: MD1.14 P4.2 R9.1 | length 20.3
  Top Layer w0.381: MD1.14 49.58,17.603 50.8,16.383 v2(50.8,15.113) ; v2(51.308,6.35) 51.289,6.35 50.936,5.997 49.97,5.997 49.636,5.662 R9.1 49.68,5.244 50.509,5.244 51.943,3.81 P4.2
  Bottom Layer w0.381: v2(50.8,15.113) 50.8,8.123 51.308,7.615 v2(51.308,6.35)
NetMD1_16: MD1.16 R8.2 | length 16.2
  Top Layer w0.381: v2(51.562,15.113) 51.581,15.113 52.006,15.538 53.161,15.538 53.594,15.971 MD1.16@53.594,17.272 ; v2(52.075,7.782) 52.491,7.366 54.482,7.366 55.885,5.963 R8.2
  Bottom Layer w0.381: v2(51.562,15.113) 51.562,8.313 52.075,7.8 v2(52.075,7.782)
NetMD1_33: MD1.33 P3.2 | length 10.7
  Top Layer w0.381: MD1.33@66.285,29.274 66.544,29.014 67.76,29.014 68.453,28.321 68.453,27.813 71.247,25.019 71.247,23.876 P3.2
NetMD1_36: MD1.36 P3.3 | length 12.2
  Top Layer w0.381: MD1.36@65.932,33.084 66.191,32.824 67.521,32.824 67.926,32.42 v2(67.945,32.42)
  Bottom Layer w0.381: v2(67.945,32.42) 68.562,31.802 68.562,31.641 69.977,30.226 69.977,27.686 P3.3
NetQ1_1: Q1.1 R8.1 | length 5.1
  Top Layer w0.381: Q1.1 51.364,7.559 51.684,7.239 R8.1
NetR3_1: R3.1 SW2.3 | length 4.3
  Top Layer w0.381: R3.1 21.082,43.053 22.406,44.377 23.293,44.377 SW2.3
NetR4_1: R4.1 SW3.3 | length 4.2
  Top Layer w0.381: R4.1 30.226,42.799 31.55,44.123 32.183,44.123 SW3.3
NetR5_1: R5.1 SW4.3 | length 4
  Top Layer w0.381: R5.1 3.071,41.661 3.405,41.996 3.405,42.777 4.531,43.904 4.656,43.904 5.116,44.363 SW4.3
NetR6_1: R6.1 SW5.3 | length 4.1
  Top Layer w0.381: R6.1 11.938,42.672 13.271,44.005 13.8,44.005 14.26,44.465 SW5.3
NetR7_1: R7.1 SW6.3 | length 4.5
  Top Layer w0.381: R7.1 39.37,43.307 40.551,44.488 SW6.3
ON/OFF: R1.1 SW1.1 U1.5
  other v1: 28.956,16.002 14.224,20.447
RX: MD1.34 P1.1 | length 5.1
  Top Layer w0.381: MD1.34@66.637,30.607 P1.1
TX: MD1.35 P1.2 | length 6
  Top Layer w0.381: MD1.35@66.291,31.84 66.355,31.775 70.323,31.775 P1.2
VCC: C1.2 J1.2 R1.2 U1.1
pads on no net: MD1.7 MD1.8 MD1.10 MD1.11 MD1.12 MD1.13 MD1.17 MD1.18 MD1.19 MD1.20 MD1.21 MD1.22 MD1.23 MD1.24 MD1.26 MD1.27 MD1.28 MD1.29 MD1.30 MD1.31 MD1.32 MD1.37 P4.3

## Polygon pours and split planes (outlines as drawn)
GND on 3V3 "GND_L03_P001" (solid, pour order 1): -3.683,-5.969 -3.429,-5.715 -3.429,50.419 -2.032,51.816 0.254,49.53 81.407,49.53 81.407,-1.778 80.899,-2.286 0.254,-2.286 -3.937,-6.477
3V3 on 3V3 "3V3_L03_P000" (solid, pour order 0): 1.08,39.624 47.689,39.688 47.689,34.481 58.484,34.481 67.882,25.083 67.882,20.892 74.994,20.892 74.994,17.399 68.707,17.399 66.993,15.684 56.452,15.685 56.452,0.762 52.769,0.762 52.769,6.033 50.61,8.192 41.085,8.192 41.085,33.973 1.08,33.973
GND on Top Layer "GND_L01_P004" (solid, pour order 4): -2.794,50.927 -3.81,49.911 -3.81,-3.302 77.597,-3.302 79.248,-4.953 79.248,48.514 -2.286,48.514 -3.556,49.784
GND on Mid Layer 1 "GND_L02_P003" (solid, pour order 3): -1.524,49.53 -1.524,-4.572 -1.143,-4.191 84.074,-4.191 84.074,50.419 82.042,48.387 24.511,48.387 25.527,47.371
GND on Bottom Layer "GND_L04_P002" (solid, pour order 2): -4.826,49.276 -5.08,49.022 -5.08,-4.191 87.63,-4.191 91.059,-0.762 84.709,5.588 84.709,51.943 -1.905,51.943 -5.842,48.006

## Other copper
Top Layer:
  region net 3V3: 38.862,39.243 38.862,37.338 39.878,37.338 39.878,39.243
  region net 3V3: 29.718,39.243 29.718,37.338 30.734,37.338 30.734,39.243
  region net 3V3: 20.574,39.243 20.574,37.338 21.59,37.338 21.59,39.243
  region net 3V3: 11.43,39.243 11.43,37.338 12.446,37.338 12.446,39.243
  region net 3V3: 2.286,39.243 2.286,37.338 3.302,37.338 3.302,39.243
  region net 3V3: 41.91,19.367 41.91,15.557 44.831,12.636 47.879,12.636 47.879,19.367
  region net NetD1_2: 21.717,18.288 21.717,13.716 23.622,11.811 23.622,13.081 22.86,13.843 22.86,18.288
  region net VCC: 21.209,13.716 19.939,13.716 24.257,8.636 26.289,8.636 26.289,12.7 24.13,12.7 24.13,10.16
  region net ON/OFF: 13.335,17.526 13.335,20.701 14.986,20.701 14.986,17.526
  region net ON/OFF: 26.924,18.288 26.924,13.716 29.464,13.716 29.464,18.288
  region net 3V3: 36.703,18.161 37.846,19.304 43.942,19.304 43.942,17.78 38.354,17.78 36.703,16.129
  region net 3V3: 26.289,18.161 26.289,13.716 25.019,13.716 25.019,18.789 27.298,20.828 34.036,20.828 36.703,18.161 36.703,14.097 34.671,14.097 34.671,17.526 32.512,19.685 28.047,19.685
  region net 3V3: 47.625,6.255 47.625,4.318 43.053,4.318 43.053,6.255
  region net VCC: 17.839,14.986 15.875,13.144 15.875,6.052 18.288,3.429 18.288,1.397 19.685,1.397 19.685,3.556 16.891,6.477 16.891,12.827 18.288,14.097 21.082,14.097 21.082,14.986
  region net VCC: 15.748,19.05 15.748,18.034 18.669,18.034 19.939,16.637 19.939,13.716 21.209,13.716 21.209,18.288 19.812,18.288 19.05,19.05 17.526,19.05
  region net NetD1_2: 30.226,9.906 33.02,9.906 33.02,4.445 30.226,4.445 30.226,6.35 22.606,6.35 17.907,10.922 17.907,12.319 19.939,12.319 19.939,10.922 22.987,7.874 30.226,7.874
  region net 3V3: 48.514,34.798 48.514,33.782 51.054,33.782 51.435,33.401 51.435,32.258 54.356,32.258 54.356,34.798
  region net 3V3: 40.259,10.677 40.259,4.318 43.053,4.318 43.053,9.271 46.99,13.208 43.942,14.097
  region net GND: 23.495,13.843 23.495,22.352 24.638,22.352 24.638,13.843
  region net NetD2_1: 41.91,20.828 43.434,20.828 43.434,25.146 41.91,25.146
  region net ON/OFF: 13.335,18.796 13.335,17.526 14.478,17.526 15.748,15.494 17.653,15.494 17.653,16.51 15.97,16.51 14.859,18.288 14.859,18.796
  region net +12V: 13.335,4.318 11.049,4.318 11.049,1.27 17.78,1.27 17.78,2.794 15.24,2.794 15.24,13.335 13.335,13.335
Bottom Layer:
  region net NetD1_2: 30.226,8.763 33.02,8.763 33.02,9.906 30.226,9.906 26.797,13.335 22.606,13.335 22.606,12.827 23.114,12.319 26.543,12.319
  region net ON/OFF: 28.448,18.605 26.924,20.13 13.335,20.13 13.335,20.828 27.432,20.828 29.464,18.796 29.464,15.494 28.448,15.494